# Altium PCB DE-130817.PcbDoc (part 3 of 4)
Units mil, origin at the board's own origin, x right, y up, seen from the top; angles counter-clockwise.
Board outline 5915.54 x 7594.09 mil, 2 copper layers (Top Layer, Bottom Layer), stack 12.8 mil thick; 405 components, 290 nets, 1180 pads, 331 vias.
Unrouted connection lines stored in the file: 1.
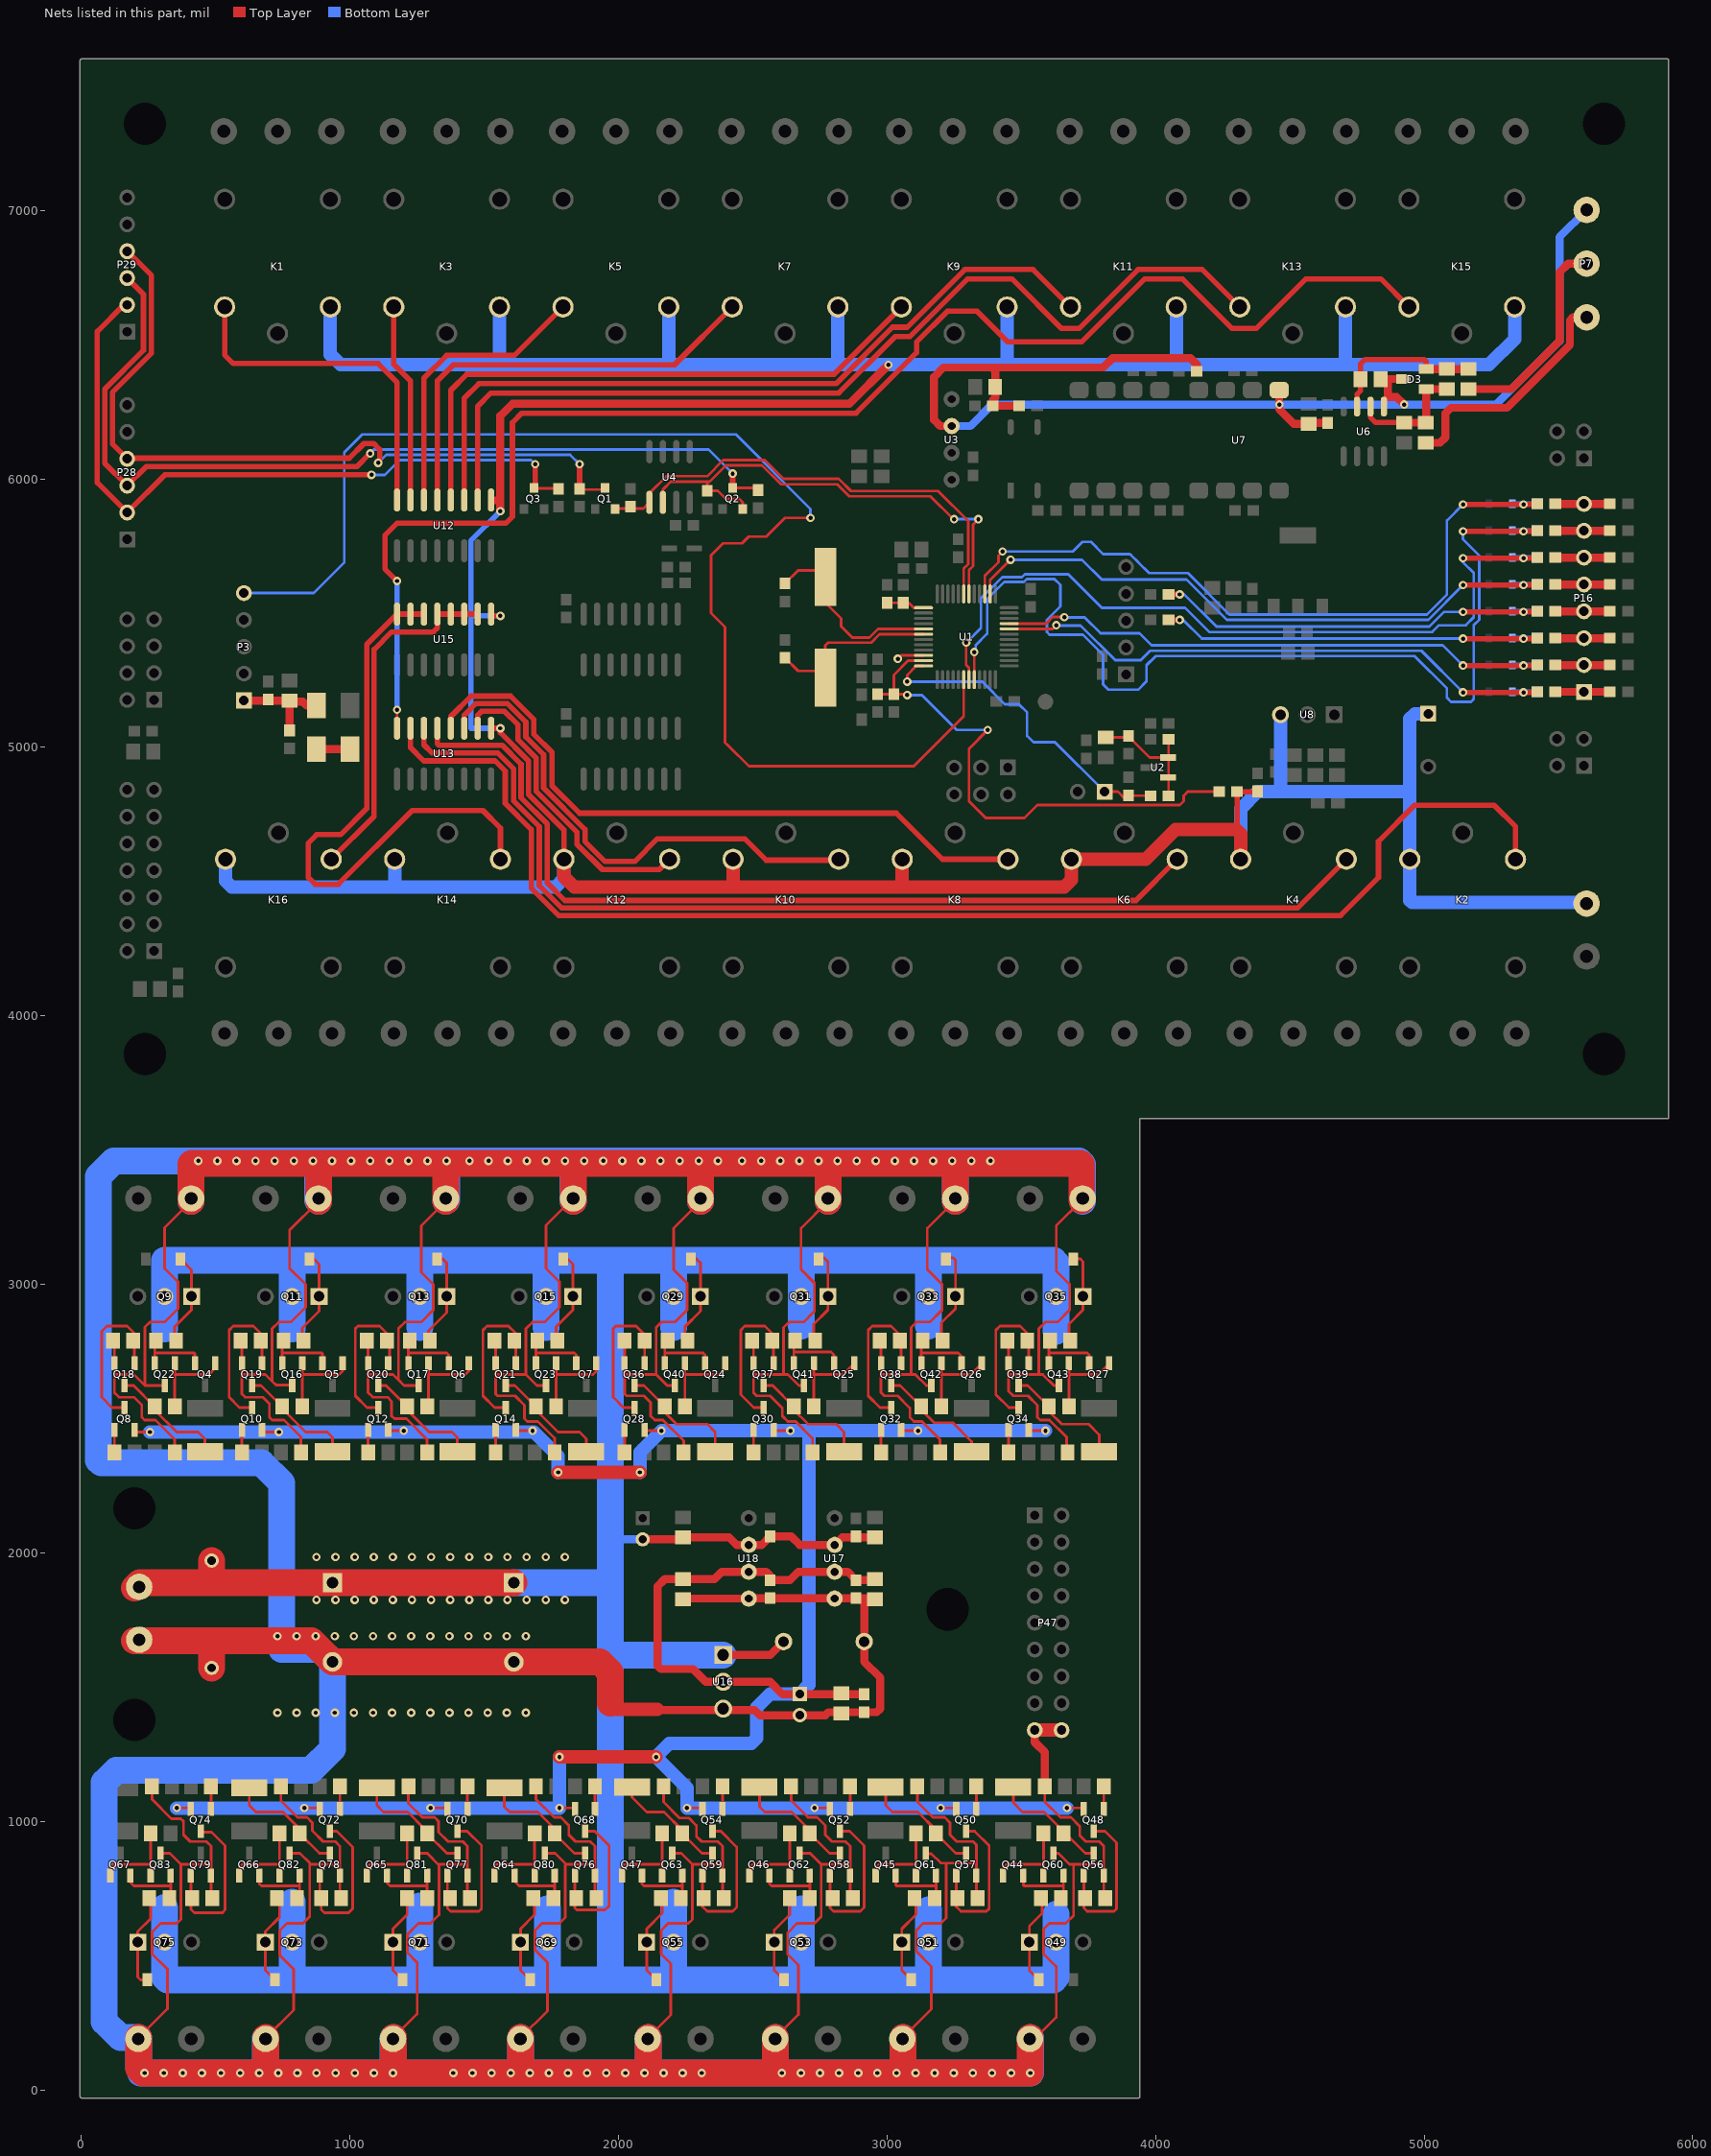
[diagram p2: the nets of this part, all layers, seen from the top]

## Via types
v1: diameter 31.5, hole 15.75, Top Layer to Bottom Layer, 331 vias

## Nets (pads, with @x,y where several pads share a name; then routed paths per layer and width w, separated by ;. In a path a pad name is that pad's centre, name@x,y a point inside that pad or via, vN(x,y) a via of type N, cw(c..) or ccw(c..) an arc to the next point about the centre after c; other vN are vias at no path point) (continued)
+5V_P: C52.1 C52.2 C53.1 C53.2 C54.1 C54.2 C55.1 C58.1 C58.2 C59.1 C59.2 C60.1 C60.2 C79.2 C80.2 C81.1 C82.1 C82.2 P30.2 P31.2 P32.2 P33.2 P34.2 P35.2 P36.2 P37.2 P38.2 P39.2 P40.2 P41.2 P42.2 P43.2 P44.2 P45.2 P46.2 P47.17 P47.18 Q8.2 Q10.2 Q12.2 Q14.2 Q16.3 Q17.3 Q18.2 Q19.2 Q20.2 Q21.2 Q22.3 Q23.3 Q28.2 Q30.2 Q32.2 Q34.2 Q36.2 Q37.2 Q38.2 Q39.2 Q40.3 Q41.3 Q42.3 Q43.3 Q48.2 Q50.2 Q52.2 Q54.2 Q56.2 Q57.2 Q58.2 Q59.2 Q60.3 Q61.3 Q62.3 Q63.3 Q68.2 Q70.2 Q72.2 Q74.2 Q76.2 Q77.2 Q78.2 Q79.2 Q80.3 Q81.3 Q82.3 Q83.3 R63.1 R64.1 R65.1 R66.1 R67.2 R68.2 R69.2 R70.2 R87.1 R88.1 R89.1 R90.1 R91.2 R92.2 R93.2 R94.2 R111.1 R112.1 R113.1 R114.1 R115.2 R116.2 R117.2 R118.2 R135.1 R136.1 R137.1 R138.1 R139.2 R140.2 R141.2 R142.2 U16.2 U16.3 U17.1 U17.2 U18.1 U18.2 | length 64127.1
  Top Layer w10: 122.6,2665 195,2665 236.34,2623.66 ; R67.2@122.6,2790 Q18.2@122.6,2706.34 122.6,2597.4 140,2580 195,2580 225,2550 225,2505 235,2495 276,2495 347.4,2423.6 R63.1@347.4,2375 ; Q8.2@197.4,2458.66 206.06,2450 v1(255,2450) ; P46.2@213.15,195 320,301.85 320,450 263.5,506.5 263.5,588.5 295,620 355,620 370,635 370,840 ; R138.1@262.6,1130 262.6,1082.4 335,1010 370,1010 380,1000 380,950 405,925 465,925 482.4,907.6 482.4,840 ; Q83.3@295,881.34 328.66,881.34 370,840 ; Q22.3@310,2623.66 236.34,2623.66 ; v1(355,1050) Q74.2@408.94,1050 ; P30.2@408.43,3310 310,3211.57 310,3060 360,3010 360,2910 310,2860 255,2860 236.34,2841.34 236.34,2623.66 ; R142.2@482.4,715 482.4,840 ; 597.6,2665 685,2665 710,2640 ; R68.2@597.6,2790 Q19.2@597.6,2706.34 597.6,2592.4 610,2580 675,2580 700,2555 700,2505 710,2495 755,2495 817.4,2432.6 R64.1@817.4,2375 ; Q10.2@681.06,2450 v1(735,2450) ; P45.2@687.44,195 790,297.56 790,450 738.5,501.5 738.5,593.5 765,620 825,620 850,645 850,845 813.66,881.34 Q82.3@775,881.34 ; R137.1@742.6,1130 742.6,1077.4 805,1015 840,1015 860,995 860,965 900,925 945,925 962.4,907.6 962.4,840 ; Q16.3@785,2623.66 783.66,2625 725,2625 710,2640 ; v1(830,1050) Q72.2@883.94,1050 ; 855,840 962.4,840 ; P31.2@882.71,3310 775,3202.29 775,3060 835,3000 835,2915 780,2860 735,2860 710,2835 710,2640 ; R141.2@962.4,715 962.4,840 ; 1067.6,2665 1160,2665 1180.67,2644.33 ; R69.2@1072.6,2790 1067.6,2785 Q20.2@1067.6,2706.34 1067.6,2597.4 1085,2580 1140,2580 1155,2565 1155,2510 1165,2500 1210,2500 1287.4,2422.6 R65.1@1287.4,2375 ; Q12.2@1146.06,2455 v1(1200,2455) ; P44.2@1161.72,195 1250,283.28 1250,475 1213.5,511.5 1213.5,578.5 1255,620 1300,620 1332.01,652.01 1332.01,840 1437.4,840 ; R136.1@1217.6,1130 1217.6,1067.4 1270,1015 1315,1015 1330,1000 1330,960 1365,925 1420,925 1437.4,907.6 1437.4,840 ; Q81.3@1250,881.34 1287.68,881.34 1332.01,837.01 ; Q17.3@1255,2623.66 1201.34,2623.66 1180.67,2644.33 ; v1(1300,1050) Q70.2@1353.94,1050 ; P32.2@1357,3310 1265,3218 1265,3045 1310,3000 1310,2905 1265,2860 1205,2860 1180.67,2835.67 1180.67,2644.33 ; R140.2@1437.4,715 1437.4,840 ; 1542.6,2665 1655,2665 ; R70.2@1542.6,2790 Q21.2@1542.6,2706.34 1542.6,2592.4 1550,2585 1615,2585 1650,2550 1650,2500 1660,2490 1700,2490 1762.4,2427.6 R66.1@1762.4,2375 ; Q14.2@1617.4,2458.66 1621.06,2455 v1(1680,2455) ; P43.2@1636.01,195 1735,293.99 1735,475 1688.5,521.5 1688.5,593.5 1715,620 1780,620 1802.01,642.01 1802.01,837.01 1805,840 ; R135.1@1692.6,1130 1692.6,1082.4 1760,1015 1785,1015 1815,985 1815,950 1840,925 1895,925 1912.4,907.6 1912.4,840 ; Q80.3@1725,881.34 1763.66,881.34 1805,840 ; Q23.3@1730,2623.66 1696.34,2623.66 1655,2665 ; v1(1780,1050) Q68.2@1833.94,1050 ; P33.2@1831.28,3310 1820,3310 1730,3220 1730,3060 1780,3010 1780,2915 1725,2860 1680,2860 1655,2835 1655,2665 ; R139.2@1912.4,720 1912.4,840 ; R91.2@2022.6,2790 Q36.2@2022.6,2706.34 2022.6,2665 ; Q28.2@2106.06,2455 v1(2160,2455) ; P42.2@2110.29,195 2195,279.71 2195,470 2158.5,506.5 2158.5,593.5 2185,620 2260,620 2275,635 2275,840 ; R114.1@2167.6,1130 2167.6,1072.4 2227.27,1012.73 2262.27,1012.73 2290,985 2290,945 2310,925 2370,925 2387.4,907.6 2387.4,840 ; Q63.3@2200,881.34 2233.66,881.34 2275,840 ; Q40.3@2210,2623.66 2181.34,2623.66 2140,2665 ; R87.1@2242.4,2375 2242.4,2417.6 2165,2495 2135,2495 2120,2510 2120,2560 2095,2585 2030,2585 2022.6,2592.4 2022.6,2665 ; v1(2255,1050) Q54.2@2308.94,1050 ; P34.2@2305.57,3310 2205,3209.43 2205,3055 2255,3005 2255,2905 2210,2860 2160,2860 2140,2840 2140,2665 ; R118.2@2387.4,715 Q59.2@2387.4,798.66 2387.4,840 ; R92.2@2502.6,2790 2502.6,2667.4 ; P41.2@2584.58,195 2670,280.42 2670,465 2630,505 2630,585 2665,620 2730,620 2755,645 2755,840 ; Q30.2@2586.06,2455 v1(2640,2455) ; R113.1@2642.6,1130 2642.6,1077.4 2705,1015 2740,1015 2770,985 2770,950 2795,925 2845,925 2862.4,907.6 2862.4,837.6 ; Q62.3@2675,881.34 2713.66,881.34 2755,840 ; Q41.3@2690,2623.66 2671.34,2623.66 2630,2665 2615,2665 ; R88.1@2722.4,2375 2722.4,2427.6 2660,2490 2630,2490 2610,2510 2610,2540 2565,2585 2515,2585 2502.6,2597.4 2502.6,2667.4 ; v1(2730,1050) Q52.2@2783.94,1050 ; P35.2@2779.85,3310 2680,3210.15 2680,3055 2730,3005 2730,2900 2690,2860 2635,2860 2615,2840 2615,2665 ; R117.2@2862.4,715 Q58.2@2862.4,798.66 2862.4,837.6 ; R93.2@2977.6,2790 Q38.2@2977.6,2706.34 2977.6,2597.4 2990,2585 3040,2585 3085,2540 3085,2505 3100,2490 3130,2490 3197.4,2422.6 R89.1@3197.4,2375 ; 2980,2665 3090,2665 ; P40.2@3058.86,195 3165,301.14 3165,460 3108.5,516.5 3108.5,593.5 3135,620 3200,620 3220,640 3220,845 ; Q32.2@3061.06,2455 v1(3115,2455) ; R112.1@3112.6,1130 3112.6,1072.4 3170,1015 3215,1015 3235,995 3235,950 3260,925 3320,925 3332.4,912.6 3332.4,845 ; Q61.3@3145,881.34 3146.34,880 3165,880 3200,845 3220,845 ; Q42.3@3165,2623.66 3146.34,2623.66 3105,2665 3090,2665 ; v1(3200,1050) Q50.2@3253.94,1050 ; P36.2@3254.14,3310 3250,3310 3150,3210 3150,3055 3205,3000 3205,2905 3160,2860 3110,2860 3090,2840 3090,2665 ; R116.2@3332.4,715 Q57.2@3332.4,798.66 3332.4,845 ; R94.2@3452.6,2790 Q39.2@3452.6,2706.34 3452.6,2665 ; P39.2@3533.15,195 3555,195 3630,270 3630,460 3583.5,506.5 3583.5,598.5 3605,620 3665,620 3695,650 3695,840 ; Q34.2@3536.06,2455 v1(3590,2455) ; R111.1@3587.6,1130 3587.6,1072.4 3645,1015 3685,1015 3718,982 3718,947 3740,925 3790,925 3807.4,907.6 3807.4,840 ; Q60.3@3620,881.34 3638.66,881.34 3680,840 3695,840 ; Q43.3@3640,2623.66 3621.34,2623.66 3580,2665 3565,2665 ; v1(3670,1050) Q48.2@3723.94,1050 ; R90.1@3672.4,2375 3668.48,2378.92 3668.48,2431.52 3605,2495 3570,2495 3560,2505 3560,2550 3525,2585 3470,2585 3452.6,2602.4 3452.6,2665 ; P37.2@3725,3313.43 3630,3218.43 3630,3050 3680,3000 3680,2905 3635,2860 3590,2860 3565,2835 3565,2665 ; R115.2@3807.4,715 Q56.2@3807.4,798.66 3807.4,840 ; 370,840 482.4,840 ; 1805,840 1912.4,840 ; 2022.6,2665 2140,2665 ; 2275,840 2387.4,840 ; 2502.6,2667.4 2505,2665 2615,2665 ; 2755,840 2860,840 2862.4,837.6 ; 3220,845 3332.4,845 ; 3452.6,2665 3565,2665 ; 3695,840 3807.4,840
  Top Layer w30: 2145,1415 2506.26,1415 2525.63,1395.63 C52.2@2675,1395.63 2770.63,1395.63 2781.54,1406.54 C54.1@2915,1406.54 2961.54,1406.54 2975,1420 2975,1535 2915,1595 C55.1@2915,1670 2915,1826.54 2920,1831.54 C82.1@2885,1831.54 C60.1@2565,1831.54 U18.1@2486.54,1831.54 ; C58.1@2240,1827.6 2242.4,1830 U18.1@2485,1830 ; C54.2@2915,1473.46 2611.54,1473.46 2565,1520 U16.2@2390,1520 2325,1520 2277.6,1567.4 2157.6,1567.4 2145,1580 2145,1875 2172.4,1902.4 C58.2@2240,1902.4 2357.4,1902.4 2385,1930 U18.2@2485,1930 2550,1930 2565,1915 C60.2@2565,1898.46 2638.46,1898.46 2670,1930 U17.2@2805,1930 2853.46,1930 C82.2@2885,1898.46 C59.2@2951.06,1898.46 ; P47.17@3550,1340 3550,1295 3587.6,1257.4 R111.1@3587.6,1130
  Top Layer w50: v1(1775,2300) v1(2080,2300) ; v1(1780,1240) v1(2140,1240) ; 1970,1440 1992.4,1417.6 2145,1417.6 ; P47.17@3550,1340 P47.18@3650,1340
  Top Layer w100: P38.2@196.85,1673.23 485,1673.23 ; P46.2@213.15,195 213.15,79.85 230,63 685,63 ; P30.2@408.43,3310 408.43,3448.43 410,3450 905,3450 ; C81.1@485,1571.65 485,1673.23 ; P45.2@687.44,195 687.44,65.44 685,63 ; P31.2@882.71,3310 882.71,3427.71 905,3450 ; v1@1161.72,71.28 P44.2@1161.72,195 ; P32.2@1357,3310 1357,3442 v1@1365,3450 ; P43.2@1636.01,195 1636.01,64.01 1635,63 ; P33.2@1831.28,3310 1831.28,3448.72 1830,3450 ; 1970,1440 1970,1555 1931,1594 C80.2@1610,1594 C79.2@935,1594 855.77,1673.23 485,1673.23 ; P42.2@2110.29,195 2110.29,78.29 v1@2095,63 ; P34.2@2305.57,3310 2305.57,3440.57 2315,3450 ; 2584.58,67.58 P41.2@2584.58,195 ; P35.2@2779.85,3310 2779.85,3444.85 ; 3058.86,69.14 P40.2@3058.86,195 ; P36.2@3254.14,3310 3254.14,3444.14 ; P39.2@3533.15,195 v1(3533.15,63.15) 3533,63 v1@2095,63 ; P37.2@3725,3313.43 3725,3445 3720,3450 2315,3450 ; 685,63 1635,63 ; 905,3450 v1@1365,3450 ; v1@1365,3450 1830,3450 ; 1635,63 v1@2095,63 ; 1830,3450 2315,3450
  Bottom Layer w50: v1(255,2450) v1(735,2450) 1685,2450 1775,2360 v1(1775,2300) ; v1(355,1050) v1(830,1050) v1(1300,1050) v1(1780,1050) v1(1780,1240) ; v1(2080,2300) 2080,2375 v1(2160,2455) v1(2640,2455) 2720,2455 ; v1(3590,2455) v1(3115,2455) 2720,2455 ; v1(3670,1050) v1(3200,1050) v1(2730,1050) v1(2255,1050) 2255,1125 v1(2140,1240) 2190,1290 2495,1290 2515,1310 2515,1425 2564.37,1474.37 C52.1@2675,1474.37 2710,1509.37 2710,2445 2720,2455
  Bottom Layer w100: P30.2@408.43,3310 408.43,3451.57 400,3460 ; P45.2@685,192.56 685,63 ; P31.2@882.71,3310 880,3312.71 880,3460 ; P44.2@1161.72,195 1160,193.28 v1(1160,63) ; P32.2@1357,3310 1360,3313 v1(1360,3460) ; P43.2@1636.01,195 1635,193.99 1635,63 ; P33.2@1831.28,3310 1830,3311.28 1830,3460 ; P42.2@2110.29,195 2110,194.71 v1@2110,63 ; P34.2@2305.57,3310 2305,3310.57 v1@2305,3460 ; P41.2@2584.58,195 2585,194.58 2585,63 ; P35.2@2779.85,3310 2779.85,3454.85 2785,3460 ; P40.2@3058.86,195 3060,193.86 3060,63 ; P36.2@3254.14,3310 3255,3310.86 v1@3255,3460 ; P39.2@3533.15,195 3535,193.15 3535,63 3060,63 ; P37.2@3728.43,3310 3728.43,3446.57 3715,3460 v1@3255,3460 ; 400,3460 880,3460 ; 400,3460 120,3460 63,3403 63,2345 73,2335 670,2335 745,2260 745,1641.5 887.5,1641.5 C79.2@935,1594 935,1270 855,1190 130,1190 85,1145 85,255 145,195 213.15,195 213.15,81.85 220,75 220,63 685,63 ; 685,63 v1(1160,63) ; 880,3460 v1(1360,3460) ; v1(1160,63) 1635,63 ; v1(1360,3460) 1830,3460 ; 1635,63 v1@2110,63 ; 1830,3460 v1@2305,3460 ; v1@2110,63 2585,63 ; v1@2305,3460 2785,3460 ; 2585,63 3060,63 ; 2785,3460 v1@3255,3460
  other v1: 235,63 306.15,63 377.31,63 448.46,63 519.62,63 590.77,63 661.92,63 733.08,63 804.23,63 875.38,63 946.54,63 1017.69,63 1088.85,63 1385,63 1456.15,63 1527.31,63 1598.46,63 1669.62,63 1740.77,63 1811.92,63 1883.08,63 1954.23,63 2025.38,63 2096.54,63 2167.69,63 2238.85,63 2310,63 2608.15,63.15 2679.3,63.15 2750.46,63.15 2821.61,63.15 2892.77,63.15 2963.92,63.15 3035.07,63.15 3106.23,63.15 3177.38,63.15 3248.53,63.15 3319.69,63.15 3390.84,63.15 3462,63.15 730,1405 801.15,1405 872.31,1405 943.46,1405 1014.62,1405 1085.77,1405 1156.92,1405 1228.08,1405 1299.23,1405 1370.38,1405 1441.54,1405 1512.69,1405 1583.85,1405 1655,1405 730,1690 801.15,1690 872.31,1690 943.46,1690 1014.62,1690 1085.77,1690 1156.92,1690 1228.08,1690 1299.23,1690 1370.38,1690 1441.54,1690 1512.69,1690 1583.85,1690 1655,1690 435,3460 506.15,3460 577.31,3460 648.46,3460 719.62,3460 790.77,3460 861.92,3460 933.08,3460 1004.23,3460 1075.38,3460 1146.54,3460 1217.69,3460 1288.85,3460 1445,3460 1516.15,3460 1587.31,3460 1658.46,3460 1729.62,3460 1800.77,3460 1871.92,3460 1943.08,3460 2014.23,3460 2085.38,3460 2156.54,3460 2227.69,3460 2298.85,3460 2370,3460 2460,3460 2531.15,3460 2602.31,3460 2673.46,3460 2744.62,3460 2815.77,3460 2886.92,3460 2958.08,3460 3029.23,3460 3100.38,3460 3171.54,3460 3242.69,3460 3313.85,3460 3385,3460
+BAT: C37.2 C38.1 K1.2 K2.2 K3.2 K4.2 K5.2 K6.2 K7.2 K8.2 K9.2 K10.2 K11.2 K12.2 K13.2 K14.2 K15.2 K16.2 P8.2 R45.2 U8.3 U12.9 U13.9 U15.9 | length 17044.2
  Top Layer w20: U13.9@1525.32,5071.49 v1(1560,5071.49) 1560,5055 1665,4950 1665,4825 1796.56,4693.44 K12.2@1796.56,4583.57 ; U15.9@1525.32,5496.49 1531.8,5490 v1(1560,5490) ; v1(1560,5880) v1@1560,5886.8 ; 4300,4695 4303.46,4698.46 R45.2@4303.46,4835 4373.46,4835 C37.2@4380,4841.54
  Top Layer w30: 1540,5920 1560,5920 ; v1@1560,5886.8 1560,5920 ; v1(3005,6425) 2860,6280 1605,6280 1560,6235 1560,5920
  Top Layer w50: K12.2@1796.56,4583.57 1796.56,4518.44 1835,4480 2426.6,4480 ; K10.2@2426.6,4583.57 2426.6,4480 ; K8.2@3056.65,4583.57 3056.65,4480 ; K4.2@4316.74,4583.57 4316.74,4678.26 4300,4695 4075,4695 3963.57,4583.57 K6.2@3686.69,4583.57 3686.69,4506.69 3660,4480 3056.65,4480 ; 2426.6,4480 3056.65,4480
  Bottom Layer w20: 1450,5490 v1(1560,5490) ; v1(1560,5071.49) 1450,5071.49 1450,5770 v1(1560,5880)
  Bottom Layer w50: K16.2@536.47,4583.57 536.47,4503.53 560,4480 1170,4480 ; K1.2@926.85,6640.43 926.85,6463.15 965,6425 1555,6425 ; K14.2@1166.51,4583.57 1166.51,4483.49 1170,4480 ; K3.2@1556.9,6640.43 1556.9,6426.9 1555,6425 ; K12.2@1796.56,4583.57 1796.56,4511.56 1765,4480 1170,4480 ; K5.2@2186.94,6640.43 2186.94,6426.94 2185,6425 ; K7.2@2816.99,6640.43 2816.99,6428.01 2820,6425 ; K9.2@3447.03,6640.43 3447.03,6427.03 3445,6425 ; K11.2@4077.08,6640.43 4077.08,6432.08 4070,6425 ; K4.2@4316.74,4583.57 4316.74,4771.74 4380,4835 4465,4835 ; U8.3@4465.32,5122 4465,5121.68 4465,4835 ; K13.2@4707.12,6640.43 4707.12,6427.12 4705,6425 ; 4946.78,4835 4465,4835 ; C38.1@5015.32,5125.43 4965.43,5125.43 4946.78,5106.78 K2.2@4946.78,4583.57 4946.78,4430.37 4955,4422.16 P8.2@5605.32,4422.16 ; K15.2@5337.17,6640.43 5337.17,6521.17 5241,6425 4705,6425 ; 1555,6425 2185,6425 ; 2185,6425 2820,6425 ; 2820,6425 v1(3005,6425) 3445,6425 ; 3445,6425 4070,6425 ; 4070,6425 4705,6425
+BAT_PWM: C55.2 C56.2 C57.1 C61.1 C62.1 C79.1 C80.1 C81.2 C83.1 P38.1 Q9.2 Q11.2 Q13.2 Q15.2 Q29.2 Q31.2 Q33.2 Q35.2 Q49.2 Q51.2 Q53.2 Q55.2 Q69.2 Q71.2 Q73.2 Q75.2 U16.1 U17.3 U18.3 | length 17036.1
  Top Layer w30: C56.2@2090,2050.63 C62.1@2233.03,2050.63 ; C62.1@2240,2057.6 2412.4,2057.6 2440,2030 U18.3@2485,2030 2533.46,2030 C57.1@2565,2061.54 2643.46,2061.54 2675,2030 U17.3@2805,2030 2832.6,2057.6 C61.1@2955,2057.6 ; U16.1@2390,1620 2565,1620 C55.2@2615,1670
  Top Layer w100: P38.1@196.85,1870.08 216.04,1889.27 485,1889.27 ; C81.2@485,1971.65 485,1889.27 ; C80.1@1610,1889.27 C79.1@935,1889.27 485,1889.27
  Bottom Layer w30: 1975.63,2050.63 C56.2@2090,2050.63
  Bottom Layer w100: 310,680 310,420 320,410 785,410 ; 310,2835 310,3090 780,3090 ; 785,700 785,410 ; 785,2835 785,3085 780,3090 ; 1260,415 1260,685 ; 1260,2840 1260,3085 1265,3090 ; C80.1@1610,1889.27 1969.27,1889.27 1970,1890 ; 1730,2840 1730,3090 ; 1735,675 1735,420 1745,410 ; 2205,700 2205,410 ; 2205,2840 2205,3085 ; U16.1@2390,1620 1970,1620 ; 2680,415 2680,675 ; 2680,2845 2680,3070 2660,3090 ; 3155,670 3155,410 ; 3155,2845 3155,3090 ; 3630,655 3630,420 3620,410 3155,410 ; 3630,2825 3630,3080 3620,3090 3155,3090 ; 780,3090 1265,3090 ; 785,410 1745,410 ; 1265,3090 1730,3090 ; 1730,3090 1970,3090 ; 1745,410 1985,410 ; 1970,1620 1970,1890 ; 1970,1620 1970,425 1985,410 ; 1970,1890 1970,3090 ; 1970,3090 2660,3090 ; 1985,410 2205,410 ; 2205,410 3155,410 ; 2660,3090 3155,3090
  other v1: 875,1825 946.15,1825 1017.31,1825 1088.46,1825 1159.62,1825 1230.77,1825 1301.92,1825 1373.08,1825 1444.23,1825 1515.38,1825 1586.54,1825 1657.69,1825 1728.85,1825 1800,1825 875,1985 946.15,1985 1017.31,1985 1088.46,1985 1159.62,1985 1230.77,1985 1301.92,1985 1373.08,1985 1444.23,1985 1515.38,1985 1586.54,1985 1657.69,1985 1728.85,1985 1800,1985
ANIN_MUX_0: U1.10 | length 101.3
  Top Layer w10: v1(3040,5330) 3053.1,5343.1 U1.10@3135.87,5343.1
BATT_VOLTAGE: C51.2 R45.1 R46.2 U1.11 | length 1972.3
  Top Layer w10: R46.2@2965,5198.46 3022.68,5198.46 3025,5200.78 3025,5270 3078.42,5323.42 U1.11@3135.87,5323.42 ; C51.2@3025,5198.46 3071.54,5198.46 v1(3075,5195) ; v1(3375,5065) 3305.47,4995.47 3305.47,4799.07 3367.54,4737 3512,4737 3560,4785 4090,4785 4105,4800 4105,4820 4120,4835 R45.1@4236.54,4835
  Bottom Layer w10: v1(3075,5195) 3130,5195 3260,5065 v1(3375,5065)
DIN0: P16.1 R26.2 R27.1 | length 203.1
  Top Layer w30: R27.1@5488.78,5207 P16.1@5595.32,5207 R26.2@5691.85,5207
DIN1: P16.2 R25.2 R28.1 | length 203.1
  Top Layer w30: R28.1@5488.78,5307 P16.2@5595.32,5307 R25.2@5691.85,5307
DIN2: P16.3 R24.2 R29.1 | length 203.1
  Top Layer w30: R29.1@5488.78,5407 P16.3@5595.32,5407 R24.2@5691.85,5407
DIN3: P16.4 R23.2 R30.1 | length 203.1
  Top Layer w30: R30.1@5488.78,5507 P16.4@5595.32,5507 R23.2@5691.85,5507
DIN4: P16.5 R31.1 R38.2 | length 203.1
  Top Layer w30: R31.1@5488.78,5607 P16.5@5595.32,5607 R38.2@5691.85,5607
DIN5: P16.6 R32.1 R37.2 | length 203.1
  Top Layer w30: R32.1@5488.78,5707 P16.6@5595.32,5707 R37.2@5691.85,5707
DIN6: P16.7 R33.1 R36.2 | length 203.1
  Top Layer w30: R33.1@5488.78,5807 P16.7@5595.32,5807 R36.2@5691.85,5807
DIN7: P16.8 R34.1 R35.2 | length 203.1
  Top Layer w30: R34.1@5488.78,5907 P16.8@5595.32,5907 R35.2@5691.85,5907
DIN_0: C40.2 D4.1 R27.2 U1.32 | length 2198.7
  Top Layer w10: U1.32@3454.77,5441.53 3616.53,5441.53 v1(3630,5455)
  Top Layer w20: v1(5145,5205) v1(5370,5205) 5419.85,5205 R27.2@5421.85,5207
  Bottom Layer w10: v1(3630,5455) 3630.75,5454.25 3720.75,5454.25 3850,5325 3945,5325 3980,5360 4990,5360 v1(5145,5205)
  Bottom Layer w20: D4.1@5329.21,5207 C40.2@5421.85,5207
DIN_1: C41.2 D5.1 R28.2 U1.33 | length 2142.8
  Top Layer w10: U1.33@3454.77,5461.21 3592.73,5461.21 3617.26,5485.75 3659.25,5485.75 v1(3660,5485)
  Top Layer w20: v1(5145,5305) v1(5370,5305) R28.2@5419.85,5305
  Bottom Layer w10: v1(3660,5485) 3660.75,5484.25 3735.75,5484.25 3795,5425 3940,5425 3985,5380 5070,5380 v1(5145,5305)
  Bottom Layer w20: D5.1@5329.21,5307 C41.2@5421.85,5307
DIN_2: C42.2 D6.1 R6.2 R29.2 | length 1488.9
  Top Layer w20: R6.2@4053.78,5472 4056.78,5475 v1(4090,5475) ; v1(5145,5405) v1(5370,5405) R29.2@5419.85,5405
  Bottom Layer w10: v1(4090,5475) 4102,5475 4172,5405 v1(5145,5405)
  Bottom Layer w20: D6.1@5329.21,5407 C42.2@5421.85,5407
DIN_3: C43.2 D7.1 R7.2 R30.2 | length 1532
  Top Layer w20: R7.2@4053.78,5572 4055.78,5570 v1@4095,5570 ; v1(5145,5505) v1(5370,5505) R30.2@5419.85,5505
  Bottom Layer w10: v1@4095,5570 4107,5570 4227,5450 5020,5450 5075,5505 v1(5145,5505)
  Bottom Layer w20: D7.1@5329.21,5507 C43.2@5421.85,5507
  other v1: 4090,5570
DIN_4: C47.2 D11.1 R31.2 U1.38 | length 2360.1
  Top Layer w10: U1.38@3383.9,5571.45 3383.9,5623.9 3459,5699 v1(3460,5699)
  Top Layer w20: v1(5145,5605) v1(5370,5605) R31.2@5419.85,5605
  Bottom Layer w10: v1@3459.25,5698.25 v1(3460,5699) 3726,5699 3800,5625 4115,5625 4265,5475 5015.46,5475 5145,5604.54 v1(5145,5605)
  Bottom Layer w20: D11.1@5329.21,5607 C47.2@5421.85,5607
DIN_5: C46.2 D10.1 R32.2 U1.19 | length 2920.8
  Top Layer w10: v1@3294.25,5390 3294.25,5307.26 3305.16,5296.36 U1.19@3305.16,5252.55
  Top Layer w20: v1(5145,5705) v1(5370,5705) 5419.85,5705 R32.2@5421.85,5707
  Bottom Layer w10: v1(3295,5390) 3350,5445 3350,5555 3429.25,5634.25 3502.74,5634.25 3513.48,5645 3675,5645 3800,5520 4110,5520 4200,5430 5030,5430 5055,5455 5155,5455 5185,5485 5185,5650 5145,5690 v1(5145,5705)
  Bottom Layer w20: D10.1@5329.21,5707 C46.2@5421.85,5707
DIN_6: C45.2 D9.1 R33.2 U1.20 | length 3776.4
  Top Layer w10: U1.20@3324.84,5252.55 3324.84,5354.84 v1(3325,5355)
  Top Layer w20: v1(5145,5805) v1(5370,5805) R33.2@5419.85,5805
  Bottom Layer w10: v1@3330,5355 3330,5380 3372.73,5422.73 3372.73,5552.27 3436.71,5616.25 3510.19,5616.25 3520.94,5627 3623,5627 3645,5605 3645,5525 3595,5475 3595,5430 3605,5420 3729.54,5420 3805,5344.54 3805,5235 3825,5215 3935,5215 3966.25,5246.25 3966.25,5306.25 4000,5340 4965,5340 5085,5220 5085,5185 5100,5170 5175,5170 5185,5180 5185,5455 5205,5475 5205,5715 5145,5775 v1(5145,5805)
  Bottom Layer w20: D9.1@5329.21,5807 C45.2@5421.85,5807
DIN_7: C44.2 D8.1 R34.2 U1.39 | length 2726.3
  Top Layer w10: U1.39@3364.21,5571.45 3364.21,5639.21 3415,5690 3415,5715 v1(3430,5730)
  Top Layer w20: v1(5145,5905) v1(5370,5905) R34.2@5419.85,5905
  Bottom Layer w10: v1(3430,5730) 3691.52,5730 3727.26,5765.75 3759.25,5765.75 3805,5720 3905,5720 3908.47,5716.53 3908.76,5716.53 3934.84,5690.44 3934.84,5690.16 3975.75,5649.25 4120.75,5649.25 4275,5495 5010,5495 5085,5570 5085,5845 v1(5145,5905)
  Bottom Layer w20: D8.1@5329.21,5907 C44.2@5421.85,5907
DOUT_0: K1.5 U12.16 | length 1301.3
  Top Layer w20: K1.5@533.15,6640.43 533.15,6461.85 565,6430 1105,6430 1175.32,6359.68 U12.16@1175.32,5921.49
DOUT_1: K3.5 U12.15 | length 744.7
  Top Layer w20: K3.5@1163.19,6640.43 1163.19,6426.81 1225.32,6364.68 U12.15@1225.32,5921.49
DOUT_2: K5.5 U12.14 | length 1081.6
  Top Layer w20: U12.14@1275.32,5921.49 1275.32,6375.32 1360,6460 1612.81,6460 K5.5@1793.24,6640.43
DOUT_3: K7.5 U12.13 | length 1655.8
  Top Layer w20: U12.13@1325.32,5921.49 1325.32,6365.32 1385,6425 2207.86,6425 K7.5@2423.29,6640.43
DOUT_4: K9.5 U12.12 | length 2215.3
  Top Layer w20: U12.12@1375.32,5921.49 1375.32,6330.32 1435,6390 2802.91,6390 K9.5@3053.33,6640.43
DOUT_5: K11.5 U12.11 | length 2893.4
  Top Layer w20: U12.11@1425.32,5921.49 1425.32,6300.32 1480,6355 2810,6355 3020,6565 3075,6565 3290,6780 3543.8,6780 K11.5@3683.38,6640.43
DOUT_6: K13.5 U12.10 | length 3609.1
  Top Layer w20: U12.10@1475.32,5921.49 1475.32,6270.32 1525,6320 2820,6320 3030,6530 3085,6530 3300,6745 3465,6745 3650,6560 3715,6560 3935,6780 4173.85,6780 K13.5@4313.42,6640.43
DOUT_7: K15.5 U13.16 | length 5466.6
  Top Layer w10: v1(1175,5140) 1175.32,5139.68 U13.16@1175.32,5071.49
  Top Layer w20: v1(1175,5620) 1130,5665 1130,5790 1175,5835 1580,5835 1605,5860 1605,6210 1640,6245 2885,6245 3110,6470 3110,6510 3225,6625 3335,6625 3450,6510 3724.6,6510 3959.6,6745 4100,6745 4285,6560 4375,6560 4560,6745 4838.89,6745 K15.5@4943.47,6640.43
  Bottom Layer w20: v1(1175,5140) v1(1175,5620)
DOUT_8: K2.5 U13.15 | length 5048.4
  Top Layer w20: U13.15@1225.32,5071.49 1225.32,4999.68 1275,4950 1540,4950 1578.24,4911.76 1578.24,4791.76 1675,4695 1675,4475.8 1776.8,4374 4689,4374 4830,4515 4830,4650 4965,4785 5260,4785 5340.48,4704.52 K2.5@5340.48,4583.57
DOUT_9: K4.5 U13.14 | length 4022.8
  Top Layer w20: U13.14@1275.32,5071.49 1275.32,5009.68 1305,4980 1550,4980 1609,4921 1609,4801 1705,4705 1705,4485.4 1788.4,4402 4528.86,4402 K4.5@4710.44,4583.57
DOUT_10: K6.5 U13.13 | length 3319.8
  Top Layer w20: U13.13@1325.32,5071.49 1325.32,5014.68 1332,5008 1567,5008 1637,4938 1637,4813 1735,4715 1735,4495 1800,4430 3926.82,4430 K6.5@4080.39,4583.57
DOUT_11: K8.5 U13.12 | length 2507
  Top Layer w20: U13.12@1375.32,5071.49 1375.32,5115.32 1451,5191 1598.2,5191 1685,5104.2 1685,5048.79 1752.3,4981.49 1752.3,4857.3 1854.6,4755 3035,4755 3206.43,4583.57 K8.5@3450.35,4583.57
DOUT_12: K10.5 U13.11 | length 1929.3
  Top Layer w20: U13.11@1425.32,5071.49 1425.32,5120.32 1468,5163 1586.6,5163 1655,5094.6 1655,5039.2 1721,4973.2 1721,4849 1875,4695 1875,4650 1950,4575 2060,4575 2145,4660 2470,4660 2550,4580 2805.61,4580 2820.3,4565.3 K10.5@2820.3,4583.57
DOUT_13: K12.5 U13.10 | length 1162
  Top Layer w20: U13.10@1475.32,5071.49 1475.32,5120.32 1490,5135 1575,5135 1625,5085 1625,5029.6 1693,4961.6 1693,4837 1845,4685 1845,4640 1940,4545 2151.68,4545 K12.5@2190.26,4583.57
DOUT_14: K14.5 U15.14 U15.15 U15.16 | length 2253.1
  Top Layer w20: U15.14@1275.32,5496.49 U15.15@1225.32,5496.49 U15.16@1175.32,5496.49 1062,5383.17 1062,4772 965,4675 876,4675 845,4644 845,4515 870,4490 957,4490 1232,4765 1495,4765 1560.21,4699.79 K14.5@1560.21,4583.57
DOUT_15: K16.5 U15.10 U15.11 U15.12 U15.13 | length 1317.4
  Top Layer w20: K16.5@930.17,4583.57 1090,4743.41 1090,5365 1155,5430 1310,5430 1325.32,5445.32 U15.13@1325.32,5496.49 U15.12@1375.32,5496.49 U15.11@1425.32,5496.49 U15.10@1475.32,5496.49
GND_COM: C18.1 C19.1 C20.1 C27.1 C39.2 D3.3 P7.3 R10.2 R17.1 U3.3 U6.5 U7.5 | length 4904.5
  Top Layer w30: U3.3@3240.32,6197 3198,6197 3175,6220 3175,6380 3210,6415 3390,6415 ; R10.2@3491.85,6272 C20.1@3393.78,6272 3393.78,6293.78 3402.72,6302.72 C19.1@3402.72,6342 3402.72,6402.28 3390,6415 ; C39.2@4153.46,6400 4153.46,6426.54 4130,6450 3840,6450 3805,6415 3390,6415 ; 4460.32,6259.68 4515.4,6204.6 C18.1@4570.32,6204.6 ; v1@4460.32,6277 U7.5@4460.32,6331.02 ; C18.1@4574.25,6208.54 C27.1@4640.32,6208.54 ; D3.3@4922.99,6372 4865,6372 4865,6305 4898,6305 v1(4926,6277)
  Bottom Layer w30: U3.3@3240.32,6197 3311,6197 3391,6277 v1(4461,6277) v1(4926,6277) 5268,6277 5504,6513 5504,6900.53 P7.3@5605.32,7001.84
H_I2C_SCL: P28.3 P29.3 Q2.3 R42.1 | length 3392.4
  Top Layer w10: Q2.3@2425.32,5966.37 2509.41,5966.37 R42.1@2520.32,5955.46
  Top Layer w20: P29.3@170.32,6748.18 231,6687.5 231,6479 87,6335 87,6058.32 P28.3@170.32,5975 241.32,6046 1026,6046 v1(1075,6095) ; Q2.3@2425,5966.69 v1(2425,6020)
  Bottom Layer w10: v1(1075,6095) 1089,6109 2336,6109 v1(2425,6020)
H_I2C_SDA: P28.4 P29.4 Q1.3 R40.1 | length 2883.6
  Top Layer w10: R40.1@1859.85,5960 1946.69,5960 Q1.3@1950.32,5956.37
  Top Layer w20: P29.4@170.32,6848.18 261,6757.5 261,6468 115,6322 115,6130.32 P28.4@170.32,6075 170.32,6077.5 997.5,6077.5 1052,6132 1088.75,6132 1110.75,6110 1110.75,6065.75 v1(1105,6060) ; R40.1@1850.32,5963.35 1855,5968.04 v1(1855,6055)
  Bottom Layer w10: v1(1105,6060) 1135,6090 1820,6090 v1(1855,6055)
H_PWM_OE: P28.2 P29.2 Q3.3 R44.1 | length 2691.5
  Top Layer w10: Q3.3@1675.32,5956.37 1683.95,5965 1765.78,5965 R44.1@1780.32,5950.46
  Top Layer w20: P29.2@170.32,6648.18 158.18,6648.18 59,6549 59,5986.32 P28.2@170.32,5875 310.32,6015 v1(1080,6015) ; Q3.3@1685,5966.37 1690,5971.37 v1(1690,6055)
  Bottom Layer w10: v1(1080,6015) 1130,6015 1185,6070 1675,6070 v1(1690,6055)
  Bottom Layer w20: v1(1080,6015) v1@1085,6020
HC12_SET: P3.5 U1.18 | length 5031.1
  Top Layer w10: v1(2715,5855) 2620,5855 2550,5785 2485,5785 2460,5760 2389.54,5760 2345,5715.46 2345,5500 2397,5448 2397,5018 2407,5008 2407.46,5008 2485.46,4930 3099.54,4930 3285.47,5115.93 U1.18@3285.47,5252.55
  Bottom Layer w10: P3.5@605,5575 865,5575 979,5689 979,6099.91 1045.09,6166 2437.19,6166 2715,5888.19 v1(2715,5855) v1@2715,5853
HEATSINK_T: C4.2 P2.1 R2.1 U1.12 | length 1244.7
  Top Layer w10: v1(3075,5245) 3075,5270 3108.73,5303.73 U1.12@3135.87,5303.73 ; P2.1@3810,4835 3860,4835 3883.46,4811.54 3900,4811.54 3908.46,4820 3971.54,4820 R2.1@3981.54,4810
  Bottom Layer w10: v1(3075,5245) 3355,5245 3438.75,5161.25 3490.99,5161.25 3521.69,5130.56 3521.69,5043.31 3545,5020 3625,5020 P2.1@3810,4835
I2C1_SCL: Q2.2 R43.1 U1.42 U4.6 | length 1845.6
  Top Layer w10: U4.6@2165.32,5912.51 2165.32,5960.32 2195,5990 2339,5990 2399.75,6050.75 2534.25,6050.75 2605,5980 2815,5980 2860,5935 3162,5935 3247,5850 v1(3250,5850) ; 2330.32,5990 R43.1@2330.32,5955.46 2369.54,5955.46 2400,5925 2450,5925 2462.72,5912.28 Q2.2@2462.72,5887.63 ; U1.42@3305.16,5571.45 3305.16,5660.61 3320,5675.46 3320,5830 v1(3340,5850)
  Bottom Layer w10: v1(3250,5850) v1(3340,5850)
I2C1_SDA: Q1.2 R41.1 U1.43 U4.5 | length 1786.8
  Top Layer w10: Q1.2@1987.72,5877.63 2000.09,5890 2092.8,5890 U4.5@2115.32,5912.51 2115.32,5947.32 2178,6010 2330,6010 2390,6070 2545,6070 2615,6000 2820.46,6000 2865.46,5955 3190,5955 3302,5843 3302,5682.91 3285.47,5666.39 U1.43@3285.47,5571.45
NetC1_2: C1.2 C3.2 R1.1 R2.2 U2.1 U2.2 | length 484.3
  Top Layer w10: C1.2@3815,5037.4 3896.06,5037.4 3900,5033.46 3906.54,5033.46 3977.6,4962.4 U2.2@4047.4,4962.4 ; R2.2@4048.46,4810 4048.46,4886.54 U2.1@4047.4,4887.6 4048.46,4888.66 R1.1@4048.46,5030
NetC5_1: C5.1 C6.1 D1.2 P3.1 R3.1 | length 389.1
  Top Layer w30: P3.1@605,5175 605.4,5174.6 C5.1@775.32,5174.6 ; R3.1@775.32,5063.46 C5.1@775.32,5174.6 ; D1.2@875,5155.71 839.29,5155.71 825,5170 779.91,5170 C5.1@775.32,5174.6
NetC11_2: C11.2 U1.5 Y1.1 | length 740
  Top Layer w10: C11.2@2620.32,5610.46 2668.86,5659.01 2770.32,5659.01 2770.32,5539.68 2829.1,5480.9 2829.1,5450.9 2870.75,5409.25 2934.25,5409.25 2966.53,5441.53 U1.5@3135.87,5441.53
NetC12_2: C12.2 U1.6 Y1.2 | length 648.6
  Top Layer w10: C12.2@2620.32,5333.54 2668.86,5284.99 Y1.2@2770.32,5284.99 ; Y1.2@2770,5285.31 Y1.2@2770.32,5284.99 ; U1.6@3135.87,5421.84 2972.3,5421.84 2940.46,5390 2780,5390 2770.32,5380.32 Y1.2@2770.32,5284.99
NetC13_1: C13.1 R8.1 U1.1 | length 143.1
  Top Layer w10: C13.1@3000.32,5538.54 R8.1@3060.32,5538.54 3081.46,5538.54 3099.73,5520.27 U1.1@3135.87,5520.27
NetD1_1: D1.1 D2.2 | length 125
  Top Layer w30: D1.1@875,4994.29 D2.2@1000,4994.29
NetD3_1: D3.1 R11.1 R13.1 R14.2 U6.6 | length 457.1
  Top Layer w20: U6.6@4800.32,6269.52 4800.32,6229.68 4820,6210 4924.72,6210 R11.1@4925.32,6209.4
  Top Layer w30: R11.1@4925.32,6209.4 R13.1@5005.32,6209.4 5007.64,6211.72 D3.1@5007.64,6334.6 R14.2@5085.32,6334.6
NetD3_2: D3.2 R14.1 R16.1 R17.2 U6.7 | length 604.2
  Top Layer w20: U6.7@4750.32,6269.52 4750.32,6315.32 4762.91,6327.91 R17.2@4762.91,6372 4762.91,6427.91 4780,6445 5000,6445 5007.64,6437.36 D3.2@5007.64,6409.4
  Top Layer w30: D3.2@5007.64,6409.4 R14.1@5085.32,6409.4 R16.1@5165.32,6409.4
NetD13_1: D13.1 Q9.1 R55.2 | length 347.8
  Top Layer w10: R55.2@347.4,2790 347.4,2842.4 410,2905 Q9.1@410,2955 410,3054.37 D13.1@369.37,3095
NetD14_1: D14.1 Q11.1 R56.2 | length 354.8
  Top Layer w10: R56.2@822.4,2790 822.4,2837.4 885,2900 Q11.1@885,2955 885,3075 865,3095 D14.1@849.37,3095
NetD15_1: D15.1 Q13.1 R61.2 | length 359.8
  Top Layer w10: R61.2@1292.4,2790 1292.4,2827.4 1360,2895 Q13.1@1360,2955 1360,3080 1345,3095 D15.1@1324.37,3095
NetD16_1: D16.1 Q15.1 R62.2 | length 354.8
  Top Layer w10: R62.2@1767.4,2790 1767.4,2842.4 1830,2905 Q15.1@1830,2955 1830,3075 1810,3095 D16.1@1794.37,3095
NetD17_1: D17.1 Q29.1 R79.2 | length 355.7
  Top Layer w10: R79.2@2247.4,2790 2247.4,2842.4 2305,2900 Q29.1@2305,2955 2305,3080 2290,3095 D17.1@2269.37,3095
NetD18_1: D18.1 Q31.1 R80.2 | length 360.7
  Top Layer w10: R80.2@2727.4,2790 2727.4,2852.4 2780,2905 Q31.1@2780,2955 2780,3085 2765,3100 2749.37,3100 D18.1@2744.37,3095
NetD19_1: D19.1 Q33.1 R85.2 | length 363.6
  Top Layer w10: R85.2@3202.4,2790 3202.4,2857.4 3255,2910 Q33.1@3255,2955 3255,3090 3245,3100 3224.37,3100 D19.1@3219.37,3095
NetD20_1: D20.1 Q35.1 R86.2 | length 356.6
  Top Layer w10: R86.2@3677.4,2790 3677.4,2852.4 3730,2905 Q35.1@3730,2955 3730,3085 3720,3095 D20.1@3694.37,3095
NetD21_1: D21.1 Q49.1 R103.2 | length 339.5
  Top Layer w10: D21.1@3565.63,410 3530,445.63 Q49.1@3530,550 3530,610 3577.6,657.6 R103.2@3577.6,715
NetD22_1: D22.1 Q51.1 R104.2 | length 341.5
  Top Layer w10: D22.1@3090.63,410 3055,445.63 Q51.1@3055,550 3055,600 3107.6,652.6 R104.2@3107.6,715
NetD23_1: D23.1 Q53.1 R109.2 | length 343.6
  Top Layer w10: D23.1@2615.63,410 2580,445.63 Q53.1@2580,550 2580,595 2637.6,652.6 R109.2@2637.6,715
NetD24_1: D24.1 Q55.1 R110.2 | length 343.6
  Top Layer w10: D24.1@2140.63,410 2105,445.63 Q55.1@2105,550 2105,600 2162.6,657.6 R110.2@2162.6,715
NetD25_1: D25.1 Q69.1 R127.2 | length 341.5
  Top Layer w10: D25.1@1670.63,410 1635,445.63 Q69.1@1635,550 1635,600 1687.6,652.6 R127.2@1687.6,715
NetD26_1: D26.1 Q71.1 R128.2 | length 341.5
  Top Layer w10: D26.1@1195.63,410 1160,445.63 Q71.1@1160,550 1160,600 1212.6,652.6 R128.2@1212.6,715
NetD27_1: D27.1 Q73.1 R133.2 | length 341.5
  Top Layer w10: D27.1@720.63,410 685,445.63 Q73.1@685,550 685,590 737.6,642.6 R133.2@737.6,715
NetD28_1: D28.1 Q75.1 R134.2 | length 354.5
  Top Layer w10: D28.1@245.63,410 220,410 210,420 Q75.1@210,550 210,590 257.6,637.6 R134.2@257.6,715
NetP7_1: P7.1 R13.2 | length 899.4
  Top Layer w30: R13.2@5005.32,6134.6 5059.6,6134.6 5080,6155 5080,6245 5100,6265 5308.74,6265 5543,6499.26 5543,6590 5554.84,6601.84 P7.1@5605.32,6601.84
NetP7_2: P7.2 R16.2 | length 782.9
  Top Layer w30: R16.2@5165.32,6334.6 5324.6,6334.6 5505,6515 5505,6770 5536.84,6801.84 P7.2@5605.32,6801.84
NetQ4_1: Q4.1 Q22.1 R52.1 | length 343.3
  Top Layer w10: R52.1@347.4,2545.21 347.4,2665 ; Q22.1@351.34,2706.34 Q22.1@347.4,2706.34 347.4,2665 ; Q4.1@497.4,2706.34 497.4,2687.4 475,2665 347.4,2665
NetQ4_2: Q4.2 Q22.2 R55.1 | length 272.9
  Top Layer w10: Q22.2@272.6,2706.34 272.6,2750 ; R55.1@272.6,2790 272.6,2750 ; Q4.2@422.6,2706.34 422.6,2742.4 420,2745 277.6,2745 272.6,2750
NetQ5_1: Q5.1 Q16.1 R54.1 | length 345.2
  Top Layer w10: R54.1@822.4,2545.21 822.4,2665 ; Q16.1@822.4,2706.34 822.4,2665 ; Q5.1@972.4,2706.34 972.4,2677.4 960,2665 822.4,2665
NetQ5_2: Q5.2 Q16.2 R56.1 | length 270.8
  Top Layer w10: Q16.2@747.6,2706.34 747.6,2745 ; R56.1@747.6,2790 747.6,2745 ; Q5.2@897.6,2706.34 897.6,2742.4 895,2745 747.6,2745
NetQ6_1: Q6.1 Q17.1 R58.1 | length 347.3
  Top Layer w10: R58.1@1287.4,2545.21 1292.4,2550.21 1292.4,2665 ; Q17.1@1292.4,2706.34 1292.4,2665 ; Q6.1@1442.4,2706.34 1442.4,2677.4 1430,2665 1292.4,2665
NetQ6_2: Q6.2 Q17.2 R61.1 | length 268.9
  Top Layer w10: Q17.2@1217.6,2706.34 1217.6,2742.6 ; R61.1@1217.6,2790 1217.6,2742.6 ; Q6.2@1367.6,2706.34 1367.6,2737.4 1360,2745 1220,2745 1217.6,2742.6
NetQ7_1: Q7.1 Q23.1 R60.1 | length 345.2
  Top Layer w10: R60.1@1767.4,2545.21 1767.4,2665 ; Q23.1@1767.4,2706.34 1767.4,2665 ; Q7.1@1917.4,2706.34 1917.4,2677.4 1905,2665 1767.4,2665
NetQ7_2: Q7.2 Q23.2 R62.1 | length 267.9
  Top Layer w10: Q23.2@1692.6,2706.34 1692.6,2745 ; R62.1@1692.6,2790 1692.6,2745 ; Q7.2@1842.6,2706.34 1842.6,2737.4 1835,2745 1692.6,2745
NetQ8_1: Q8.1 R51.2 | length 83.7
  Top Layer w10: R51.2@122.6,2375 Q8.1@122.6,2458.66
NetQ8_3: Q8.3 Q18.1 R67.1 | length 599.3
  Top Layer w10: Q8.3@160,2541.34 113.66,2541.34 75,2580 75,2825 95,2845 170,2845 197.4,2817.6 197.4,2790 Q18.1@197.4,2706.34
NetQ10_1: Q10.1 R53.2 | length 83.7
  Top Layer w10: R53.2@597.6,2375 Q10.1@597.6,2458.66
NetQ10_3: Q10.3 Q19.1 R68.1 | length 599.3
  Top Layer w10: Q10.3@635,2541.34 588.66,2541.34 550,2580 550,2830 565,2845 640,2845 672.4,2812.6 Q19.1@672.4,2706.34
NetQ12_1: Q12.1 R57.2 | length 83.7
  Top Layer w10: R57.2@1067.6,2375 Q12.1@1067.6,2458.66
NetQ12_3: Q12.3 Q20.1 R69.1 | length 596.4
  Top Layer w10: Q12.3@1105,2541.34 1063.66,2541.34 1020,2585 1020,2835 1030,2845 1110,2845 1147.4,2807.6 Q20.1@1147.4,2711.34
NetQ14_1: Q14.1 R59.2 | length 83.7
  Top Layer w10: R59.2@1542.6,2375 Q14.1@1542.6,2458.66
NetQ14_3: Q14.3 Q21.1 R70.1 | length 599.3
  Top Layer w10: Q14.3@1580,2541.34 1538.66,2541.34 1495,2585 1495,2830 1510,2845 1590,2845 1617.4,2817.6 1617.4,2790 Q21.1@1617.4,2706.34
NetQ18_3: Q18.3 R47.1 R52.2 | length 437.8
  Top Layer w10: Q18.3@160,2623.66 194.15,2623.66 R52.2@272.6,2545.21 272.6,2532.4 355,2450 435,2450 460,2425 R47.1@460,2376.97
NetQ19_3: Q19.3 R48.1 R54.2 | length 437.8
  Top Layer w10: Q19.3@635,2623.66 669.15,2623.66 R54.2@747.6,2545.21 747.6,2537.4 835,2450 915,2450 935,2430 R48.1@935,2376.97
NetQ20_3: Q20.3 R49.1 R58.2 | length 435.8
  Top Layer w10: Q20.3@1105,2623.66 1134.15,2623.66 R58.2@1212.6,2545.21 1212.6,2532.4 1295,2450 1380,2450 1400,2430 R49.1@1400,2376.97
NetQ21_3: Q21.3 R50.1 R60.2 | length 437.8
  Top Layer w10: Q21.3@1580,2623.66 1614.15,2623.66 R60.2@1692.6,2545.21 1692.6,2532.4 1775,2450 1855,2450 1880,2425 R50.1@1880,2376.97
NetQ24_1: Q24.1 Q40.1 R76.1 | length 339.3
  Top Layer w10: R76.1@2247.4,2545.21 2247.4,2665 ; Q40.1@2247.4,2706.34 2247.4,2665 ; Q24.1@2397.4,2706.34 2397.4,2687.4 2375,2665 2247.4,2665
NetQ24_2: Q24.2 Q40.2 R79.1 | length 267.9
  Top Layer w10: Q40.2@2172.6,2706.34 2172.6,2745 ; R79.1@2172.6,2790 2172.6,2745 ; Q24.2@2322.6,2706.34 2322.6,2737.4 2315,2745 2172.6,2745
NetQ25_1: Q25.1 Q41.1 R78.1 | length 328.2
  Top Layer w10: R78.1@2727.4,2545.21 2727.4,2665 ; Q41.1@2727.4,2706.34 2727.4,2665 ; Q25.1@2877.4,2706.34 2836.06,2665 2727.4,2665
NetQ25_2: Q25.2 Q41.2 R80.1 | length 269.2
  Top Layer w10: Q41.2@2652.6,2706.34 2652.6,2748.17 ; R80.1@2652.6,2790 2652.6,2748.17 ; Q25.2@2802.6,2706.34 2802.6,2737.4 2791.83,2748.17 2652.6,2748.17
NetQ26_1: Q26.1 Q42.1 R82.1 | length 328.2
  Top Layer w10: R82.1@3202.4,2545.21 3202.4,2665 ; Q42.1@3202.4,2706.34 3202.4,2665 ; Q26.1@3352.4,2706.34 3311.06,2665 3202.4,2665
NetQ26_2: Q26.2 Q42.2 R85.1 | length 264.9
  Top Layer w10: Q42.2@3127.6,2706.34 3127.6,2745 ; R85.1@3127.6,2790 3127.6,2745 ; Q26.2@3277.6,2706.34 3277.6,2732.4 3265,2745 3127.6,2745
NetQ27_1: Q27.1 Q43.1 R84.1 | length 328.2
  Top Layer w10: R84.1@3677.4,2545.21 3677.4,2665 ; Q43.1@3677.4,2706.34 3677.4,2665 ; Q27.1@3827.4,2706.34 3786.06,2665 3677.4,2665
NetQ27_2: Q27.2 Q43.2 R86.1 | length 267.9
  Top Layer w10: Q43.2@3602.6,2706.34 3602.6,2745 ; R86.1@3602.6,2790 3602.6,2745 ; Q27.2@3752.6,2706.34 3752.6,2737.4 3745,2745 3602.6,2745
NetQ28_1: Q28.1 R75.2 | length 83.7
  Top Layer w10: R75.2@2022.6,2375 Q28.1@2022.6,2458.66
NetQ28_3: Q28.3 Q36.1 R91.1 | length 592.2
  Top Layer w10: Q28.3@2060,2541.34 2018.66,2541.34 1980,2580 1980,2835 1990,2845 2065,2845 2097.4,2812.6 Q36.1@2097.4,2706.34
NetQ30_1: Q30.1 R77.2 | length 83.7
  Top Layer w10: R77.2@2502.6,2375 Q30.1@2502.6,2458.66
NetQ30_3: Q30.3 Q37.1 R92.1 | length 593.5
  Top Layer w10: Q30.3@2540,2541.34 2503.66,2541.34 2455,2590 2455,2830 2470,2845 2545,2845 2577.4,2812.6 Q37.1@2577.4,2706.34
NetQ32_1: Q32.1 R81.2 | length 83.7
  Top Layer w10: R81.2@2977.6,2375 Q32.1@2977.6,2458.66
NetQ32_3: Q32.3 Q38.1 R93.1 | length 593.5
  Top Layer w10: Q32.3@3015,2541.34 2973.66,2541.34 2930,2585 2930,2830 2945,2845 3015,2845 3052.4,2807.6 3052.4,2790 Q38.1@3052.4,2706.34
NetQ34_1: Q34.1 R83.2 | length 83.7
  Top Layer w10: R83.2@3452.6,2375 Q34.1@3452.6,2458.66
NetQ34_3: Q34.3 Q39.1 R94.1 | length 593.5
  Top Layer w10: Q34.3@3490,2541.34 3453.66,2541.34 3405,2590 3405,2830 3420,2845 3495,2845 3527.4,2812.6 3527.4,2790 Q39.1@3527.4,2706.34
NetQ36_3: Q36.3 R71.1 R76.2 | length 458.3
  Top Layer w10: Q36.3@2060,2623.66 2094.15,2623.66 R76.2@2172.6,2545.21 2172.6,2522.4 2215,2480 2330,2480 2360,2450 R71.1@2360,2376.97
NetQ37_3: Q37.3 R72.1 R78.2 | length 452.5
  Top Layer w10: Q37.3@2540,2623.66 2574.15,2623.66 R78.2@2652.6,2545.21 2652.6,2532.4 2705,2480 2810,2480 2840,2450 R72.1@2840,2376.97
NetQ38_3: Q38.3 R73.1 R82.2 | length 432
  Top Layer w10: Q38.3@3015,2623.66 3049.15,2623.66 R82.2@3127.6,2545.21 3127.6,2532.4 3175,2485 3245,2485 3315,2415 R73.1@3315,2376.97
NetQ39_3: Q39.3 R74.1 R84.2 | length 449.5
  Top Layer w10: Q39.3@3490,2623.66 3524.15,2623.66 R84.2@3602.6,2545.21 3602.6,2527.4 3650,2480 3750,2480 3790,2440 R74.1@3790,2376.97
NetQ44_1: Q44.1 Q60.1 R100.1 | length 345.2
  Top Layer w10: Q44.1@3432.6,798.66 3432.6,827.6 3445,840 3582.6,840 ; Q60.1@3582.6,798.66 3582.6,840 ; R100.1@3582.6,959.79 R100.1@3582.6,954.79 3582.6,840
NetQ44_2: Q44.2 Q60.2 R103.1 | length 265.8
  Top Layer w10: Q44.2@3507.4,798.66 3507.4,762.6 3510,760 3657.4,760 ; R103.1@3657.4,720 3657.4,760 ; Q60.2@3657.4,798.66 3657.4,760
NetQ45_1: Q45.1 Q61.1 R102.1 | length 345.2
  Top Layer w10: Q45.1@2957.6,798.66 2957.6,827.6 2970,840 3107.6,840 ; Q61.1@3107.6,798.66 3107.6,840 ; R102.1@3107.6,959.79 3107.6,840
NetQ45_2: Q45.2 Q61.2 R104.1 | length 270.8
  Top Layer w10: Q45.2@3032.4,798.66 3032.4,762.6 3035,760 3182.4,760 ; R104.1@3182.4,715 3182.4,760 ; Q61.2@3182.4,798.66 3182.4,760
NetQ46_1: Q46.1 Q62.1 R106.1 | length 345.2
  Top Layer w10: Q46.1@2487.6,798.66 2487.6,827.6 2500,840 2637.6,840 ; Q62.1@2637.6,798.66 2637.6,840 ; R106.1@2637.6,959.79 2637.6,840
NetQ46_2: Q46.2 Q62.2 R109.1 | length 267.9
  Top Layer w10: Q46.2@2562.4,798.66 2562.4,767.6 2570,760 2712.4,760 ; R109.1@2712.4,715 2712.4,760 ; Q62.2@2712.4,798.66 2712.4,760
NetQ47_1: Q47.1 Q63.1 R108.1 | length 345.4
  Top Layer w10: Q47.1@2012.6,798.66 2012.6,827.6 2025,840 2162.6,840 ; Q63.1@2162.6,798.66 2162.6,840 ; R108.1@2162.6,960 2162.6,840
NetQ47_2: Q47.2 Q63.2 R110.1 | length 312.9
  Top Layer w10: Q47.2@2087.4,798.66 2087.4,767.6 2095,760 2237.4,760 2237.4,715 Q63.2@2237.4,798.66
NetQ48_1: Q48.1 R99.2 | length 83.7
  Top Layer w10: Q48.1@3807.4,1046.34 R99.2@3807.4,1130
NetQ48_3: Q48.3 Q56.1 R115.1 | length 601
  Top Layer w10: Q56.1@3732.6,798.66 3732.6,677.4 3745,665 3845,665 3855,675 3855,920 3811.34,963.66 Q48.3@3770,963.66
NetQ50_1: Q50.1 R101.2 | length 83.7
  Top Layer w10: Q50.1@3332.4,1046.34 R101.2@3332.4,1130
NetQ50_3: Q50.3 Q57.1 R116.1 | length 592.2
  Top Layer w10: Q57.1@3257.6,798.66 3257.6,682.4 3275,665 3370,665 3380,675 3380,910 3326.34,963.66 Q50.3@3295,963.66
NetQ52_1: Q52.1 R105.2 | length 83.7
  Top Layer w10: Q52.1@2862.4,1046.34 R105.2@2862.4,1130
NetQ52_3: Q52.3 Q58.1 R117.1 | length 602.2
  Top Layer w10: Q58.1@2787.6,798.66 2787.6,677.4 2800,665 2900,665 2915,680 2915,910 2861.34,963.66 Q52.3@2825,963.66
NetQ54_1: Q54.1 R107.2 | length 83.7
  Top Layer w10: Q54.1@2387.4,1046.34 R107.2@2387.4,1130
NetQ54_3: Q54.3 Q59.1 R118.1 | length 596.4
  Top Layer w10: Q59.1@2312.6,798.66 2312.6,682.4 2330,665 2425,665 2440,680 2440,905 2381.34,963.66 Q54.3@2350,963.66
NetQ56_3: Q56.3 R95.1 R100.2 | length 427.3
  Top Layer w10: R95.1@3470,1128.03 3470,1070 3505,1035 3585,1035 R100.2@3655,965 ; R100.2@3661.31,958.69 3738.66,881.34 Q56.3@3770,881.34
NetQ57_3: Q57.3 R96.1 R102.2 | length 449.5
  Top Layer w10: R96.1@2995,1128.03 2995,1060 3020,1035 3115,1035 3180,970 3180,957.19 R102.2@3182.4,954.79 3255.85,881.34 Q57.3@3295,881.34
NetQ58_3: Q58.3 R97.1 R106.2 | length 452.5
  Top Layer w10: R97.1@2525,1128.03 2525,1055 2545,1035 2645,1035 2712.4,967.6 R106.2@2712.4,954.79 2785.85,881.34 Q58.3@2825,881.34
NetQ59_3: Q59.3 R98.1 R108.2 | length 431.8
  Top Layer w10: R98.1@2050,1128.03 2050,1090 2105,1035 2170,1035 2235,970 2235,957.4 R108.2@2237.4,955 2311.06,881.34 Q59.3@2350,881.34
NetQ64_1: Q64.1 Q80.1 R124.1 | length 348.3
  Top Layer w10: Q64.1@1537.6,798.66 1537.6,832.6 1545,840 1687.6,840 ; Q80.1@1687.6,798.66 1687.6,840 ; R124.1@1687.6,960 1687.6,840
NetQ64_2: Q64.2 Q80.2 R127.1 | length 257.3
  Top Layer w10: Q64.2@1612.4,798.66 1612.4,777.6 1630,760 1761.73,760 1762.4,759.33 ; R127.1@1762.4,720 1762.4,759.33 ; Q80.2@1762.4,798.66 1762.4,759.33
NetQ65_1: Q65.1 Q81.1 R126.1 | length 345.4
  Top Layer w10: Q65.1@1062.6,798.66 1062.6,827.6 1075,840 1212.6,840 ; Q81.1@1212.6,798.66 1212.6,840 ; R126.1@1212.6,960 R126.1@1212.6,955 1212.6,840
NetQ65_2: Q65.2 Q81.2 R128.1 | length 259.9
  Top Layer w10: Q65.2@1137.4,798.66 1137.4,772.6 1150,760 1287.4,760 ; R128.1@1287.4,720 1287.4,760 ; Q81.2@1287.4,798.66 1287.4,760
NetQ66_1: Q66.1 Q82.1 R130.1 | length 345.4
  Top Layer w10: Q66.1@587.6,798.66 587.6,827.6 600,840 737.6,840 ; Q82.1@737.6,798.66 737.6,840 ; R130.1@737.6,960 737.6,840
NetQ66_2: Q66.2 Q82.2 R133.1 | length 267.9
  Top Layer w10: Q66.2@662.4,798.66 662.4,767.6 670,760 812.4,760 ; R133.1@812.4,715 812.4,760 ; Q82.2@812.4,798.66 812.4,760
NetQ67_1: Q67.1 Q83.1 R132.1 | length 345.4
  Top Layer w10: Q67.1@107.6,798.66 107.6,827.6 120,840 257.6,840 ; Q83.1@257.6,798.66 257.6,840 ; R132.1@257.6,960 257.6,840
NetQ67_2: Q67.2 Q83.2 R134.1 | length 259.9
  Top Layer w10: Q67.2@182.4,798.66 182.4,772.6 195,760 332.4,760 ; R134.1@332.4,720 332.4,760 ; Q83.2@332.4,798.66 332.4,760
NetQ68_1: Q68.1 R123.2 | length 83.7
  Top Layer w10: Q68.1@1912.4,1046.34 R123.2@1912.4,1130
NetQ68_3: Q68.3 Q76.1 R139.1 | length 595.2
  Top Layer w10: Q76.1@1837.6,798.66 1837.6,720 1837.6,677.4 1845,670 1950,670 1965,685 1965,910 1911.34,963.66 Q68.3@1875,963.66
NetQ70_1: Q70.1 R125.2 | length 83.7
  Top Layer w10: Q70.1@1437.4,1046.34 R125.2@1437.4,1130
NetQ70_3: Q70.3 Q77.1 R140.1 | length 605.2
  Top Layer w10: Q77.1@1362.6,798.66 1362.6,677.4 1375,665 1480,665 1490,675 1490,910 1436.34,963.66 Q70.3@1400,963.66
NetQ72_1: Q72.1 R129.2 | length 83.7
  Top Layer w10: Q72.1@962.4,1046.34 R129.2@962.4,1130
NetQ72_3: Q72.3 Q78.1 R141.1 | length 589.3
  Top Layer w10: R141.1@887.6,720 Q78.1@887.6,798.66 ; R141.1@892.6,715 892.6,672.4 905,660 995,660 1010,675 1010,905 951.34,963.66 Q72.3@925,963.66
NetQ74_1: Q74.1 R131.2 | length 83.7
  Top Layer w10: Q74.1@482.4,1046.34 R131.2@482.4,1130
NetQ74_3: Q74.3 Q79.1 R142.1 | length 610.2
  Top Layer w10: R142.1@407.6,715 407.6,672.4 420,660 525,660 535,670 535,910 485,960 448.66,960 Q74.3@445,963.66 ; R142.1@407.6,720 Q79.1@407.6,798.66
NetQ76_3: Q76.3 R119.1 R124.2 | length 453
  Top Layer w10: R119.1@1575,1125.71 1575,1055 1595,1035 1700,1035 1762.4,972.6 R124.2@1762.4,955 1836.06,881.34 Q76.3@1875,881.34
NetQ77_3: Q77.3 R120.1 R126.2 | length 444.2
  Top Layer w10: R120.1@1100,1125.71 1100,1060 1125,1035 1215,1035 1275,975 1275,967.4 R126.2@1287.4,955 1361.06,881.34 Q77.3@1400,881.34
NetQ78_3: Q78.3 R121.1 R130.2 | length 450
  Top Layer w10: R121.1@625,1125.71 625,1060 650,1035 750,1035 812.4,972.6 R130.2@812.4,955 886.06,881.34 Q78.3@925,881.34